# Altium PCB 5V_PSU_Daniel_Eisen_rev0.PcbDoc
Units mm, origin at the board's own origin, x right, y up, seen from the top; angles counter-clockwise.
Board outline 40 x 38.5 mm, 2 copper layers (Top Layer, Bottom Layer); 14 components, 6 nets, 25 pads, 0 vias.
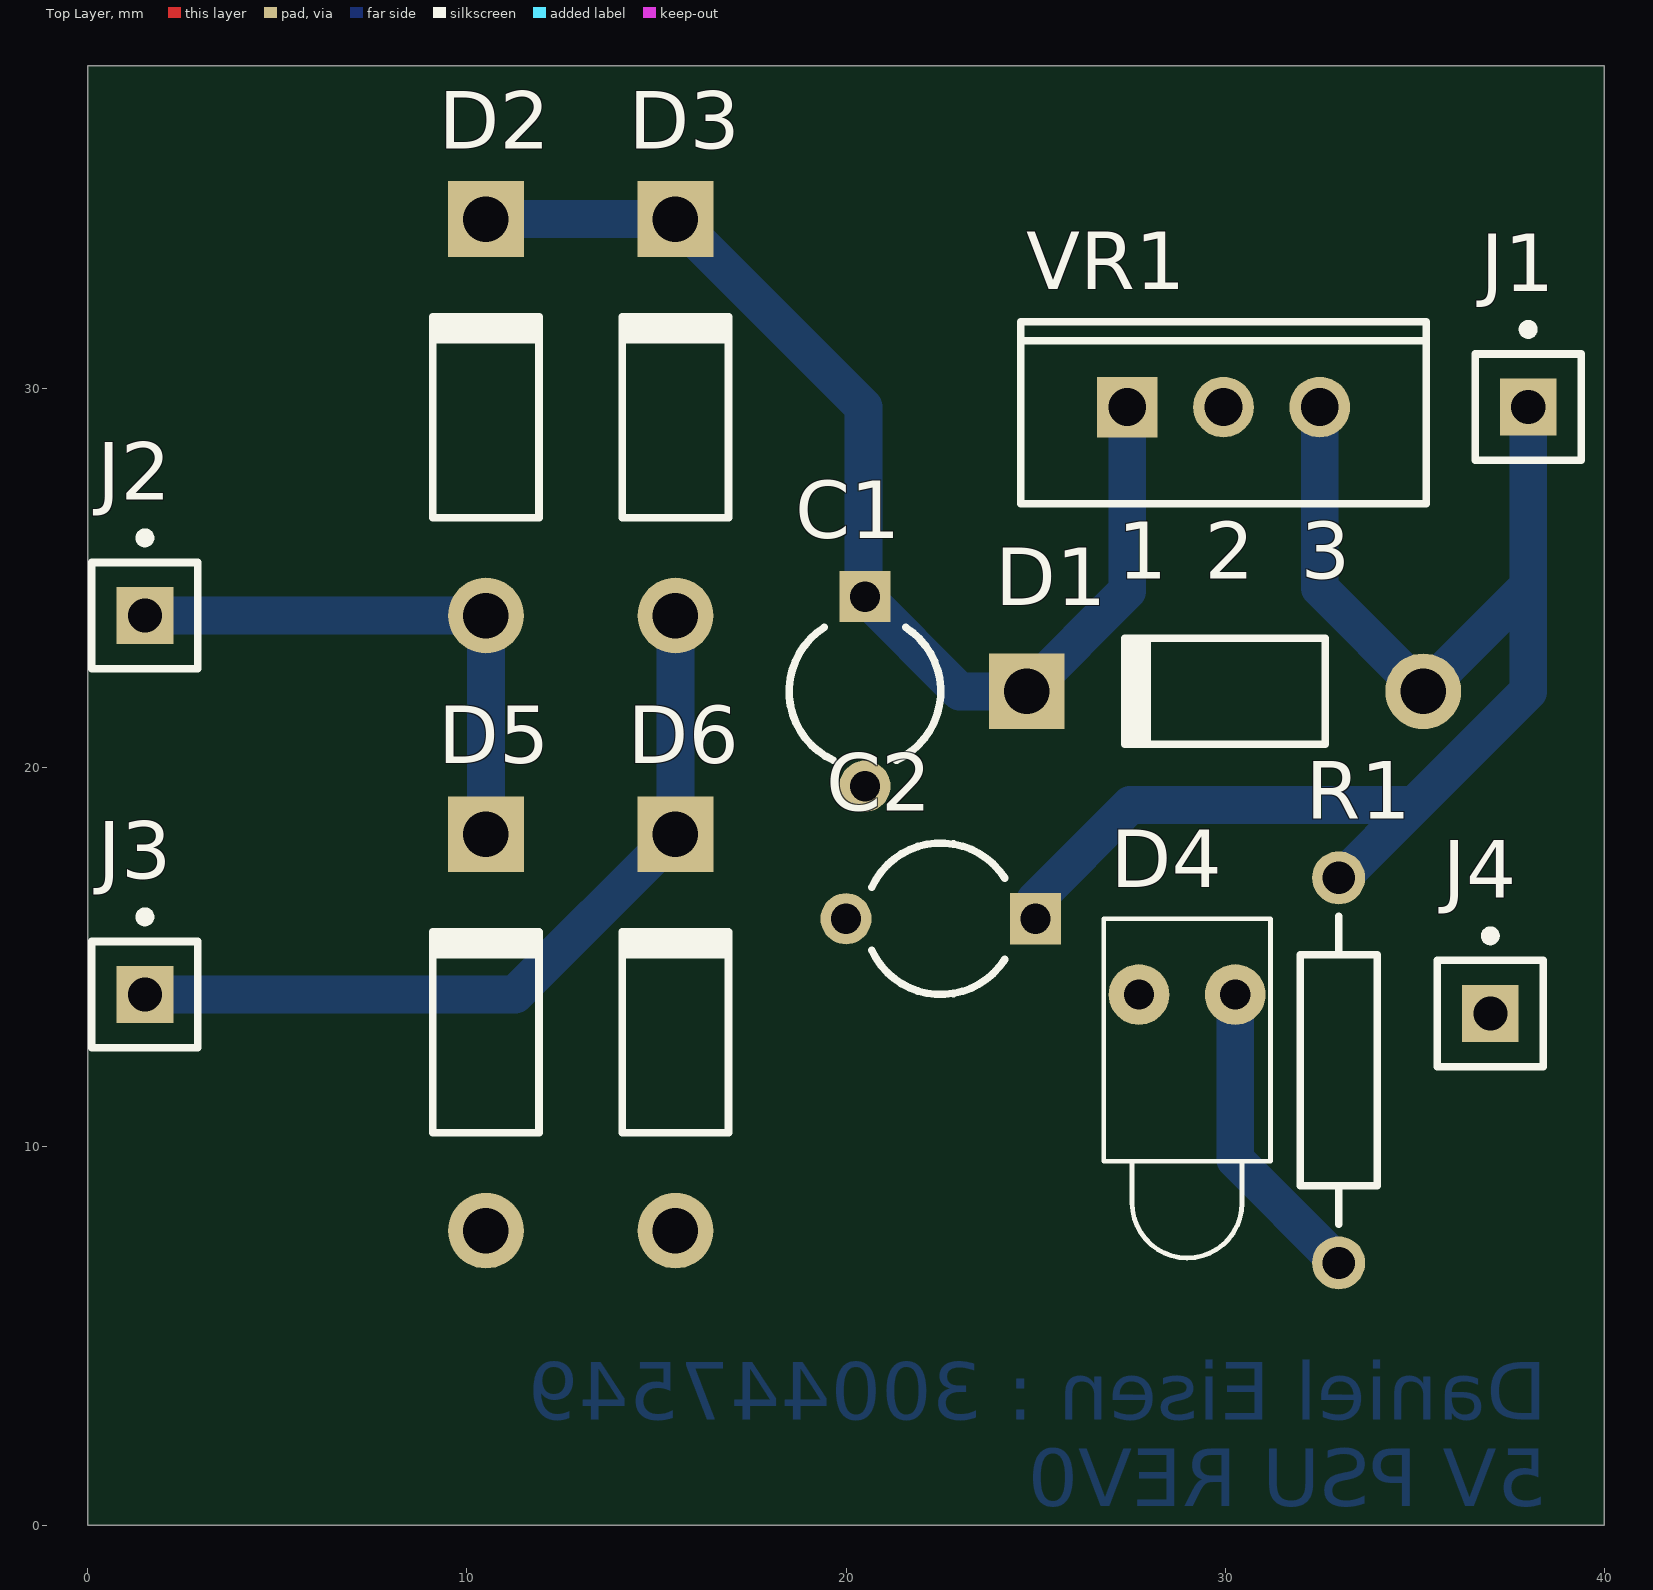
[diagram p0: Top Layer view]
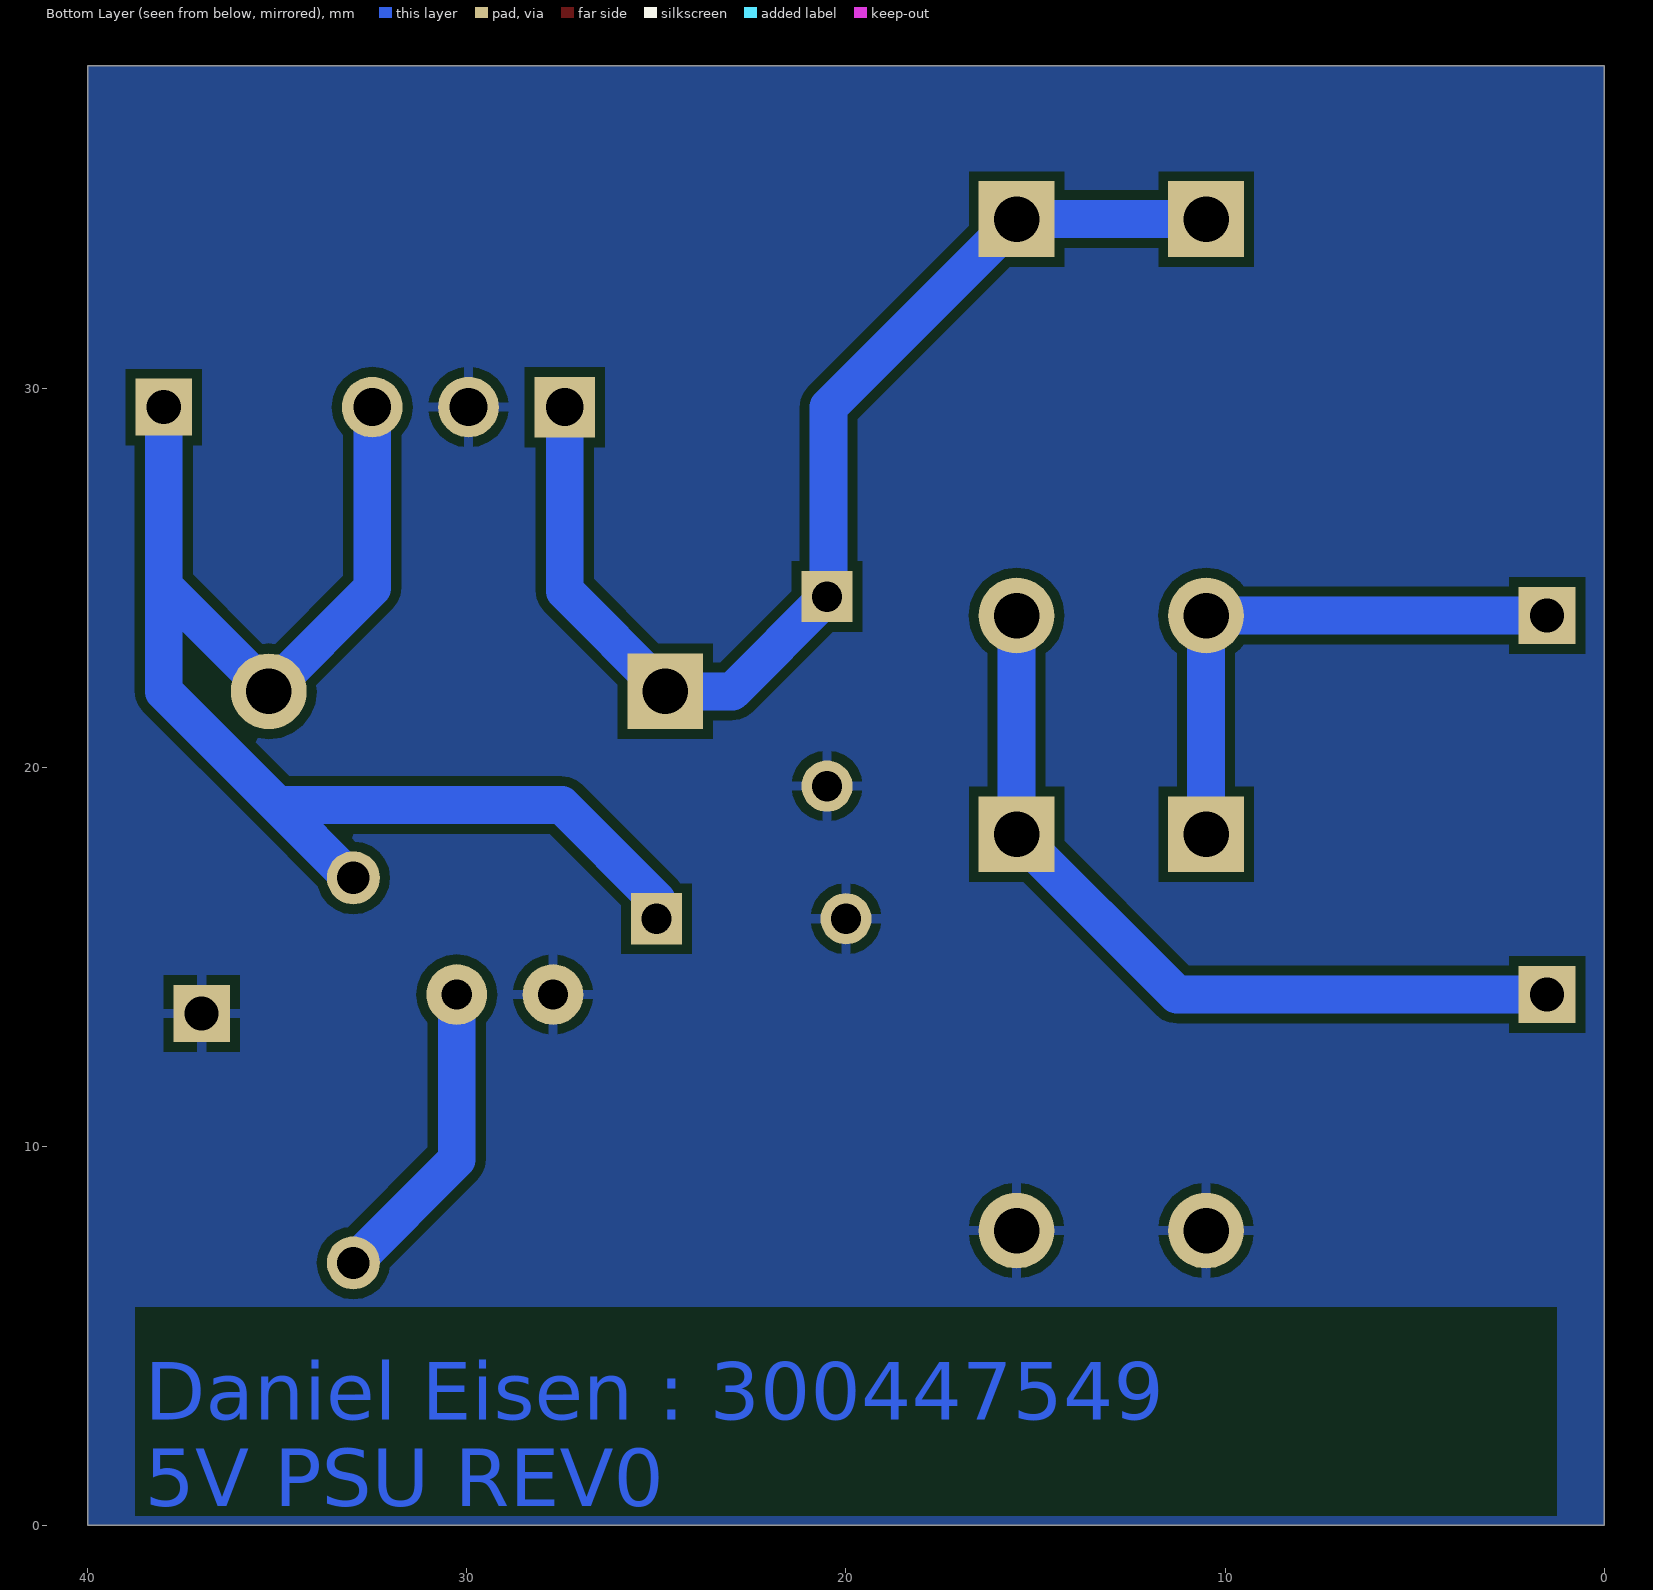
[diagram p1: Bottom Layer view, seen from below]

## Layer stack, top to bottom
Top Solder: solder mask 0.0102, Solder Resist, Dk 3.5
Top Layer: signal copper 0.0356
Dielectric 1: dielectric 0.32, FR-4, Dk 4.8
Bottom Layer: signal copper 0.0356
Bottom Solder: solder mask 0.0102, Solder Resist, Dk 3.5

## Board outline
0,0 0,38.5 40,38.5 40,0

## Design rules (kind name [scope] priority, off if disabled: settings)
Clearance [All] p1: gap=0.254 ignorepadtopadclearanceinfootprint=FALSE except(0: Arc-Hole Track-Hole SMDPad-Hole THPad-Hole Via-Hole Fill-Hole Poly-Hole Region-Hole Text-Hole)
PolygonConnect [All] p1: connectstyle=Relief reliefconductorwidth=0.254 reliefentries=4 polygonreliefangle="90 Angle" airgapwidth=0.254
RoutingVias [All] p1: holewidth=0.711 width=1.27 viastyle="Through Hole" minholewidth=0.711 minwidth=1.27 maxholewidth=0.711 maxwidth=1.27
SolderMaskExpansion [All] p1: expansion=0.102
Width [All] p1: maxlimit=2 minlimit=0.5 preferedwidth=1 minimp=50.000000 maximp=50.000000 favimp=50.000000
30 further rules are at their usual default settings.

## Classes and differential pairs
component class 5V_PSU_Daniel_Eisen_rev0: C1 D1 D2 D3 D4 D5 D6 J1 J2 J3 J4 R1 VR1

## Components (designator, comment, footprint, x,y, rotation, side; value= is the part's Value field where it differs from the comment)
C1 "Cap2" CAPR5-4X5 20.5,22 r270 top value=1uF
C2 "Cap2" CAPR5-4X5 22.5,16 r180 top value=1uF
D1 "Diode 1N4001" DO-41 30,22 r180 top
D2 "Diode 1N4001" DO-41 10.5,29.23 r90 top
D3 "Diode 1N4001" DO-41 15.5,29.23 r90 top
D4 "LED1" LED-1 29,14 r270 top
D5 "Diode 1N4001" DO-41 10.5,13 r90 top
D6 "Diode 1N4001" DO-41 15.5,13 r90 top
J1 "Socket" PIN1 38,29.5 r0 top
J2 "Socket" PIN1 1.5,24 r0 top
J3 "Socket" PIN1 1.5,14 r0 top
J4 "Socket" PIN1 37,13.5 r0 top
R1 "Res2" AXIAL-0.4 33,12 r90 top value=510R
VR1 "Volt Reg" TO-220-AB 29.96,29.5 r0 top

## Footprints (in the part's own frame and the unit in brackets; to place one, negate y for a bottom-side part, rotate by r counter-clockwise, add the part's x,y. Pads: shape width x height; smd on the part's side, far side on the other; paste and mask are expansions set on the pad)
AXIAL-0.4 [mm] "Axial Device, Thru-Hole; 2 Leads; 0.4 in Pin Spacing"
  round 1.4 hole 0.85: 1(-5.08,0) 2(5.08,0)
  silkscreen extent -4.06,-1.02 4.06,1.02
CAPR5-4X5 [mm] "Capacitor; 2 Leads"
  rect 1.35x1.35 hole 0.8: 1(-2.5,0)
  round 1.35 hole 0.8: 2(2.5,0)
  silkscreen extent -1.69,-2 1.82,2
DO-41 [mm] "Diode, Axial; Body 5.2 x 2.7 mm (LxDia. max), Lead Dia. 0.86 mm (max)"
  round 2 hole 1.2: 1(-5.23,0)
  rect 2x2 hole 1.2: 2(5.23,0)
  silkscreen extent -2.65,-1.4 2.75,1.4
LED-1 [mm] "LED; 2 Leads"
  round 1.6 hole 0.8: 1(0,1.27) 2(0,-1.27)
  silkscreen extent -2,-2.2 6.95,2.2
PIN1 [mm] "Connector; Plug"
  rect 1.5x1.5 hole 0.9: 1(0,0)
  silkscreen extent -1.4,-1.4 1.4,2.17
TO-220-AB [mm] "TO, Thru-Hole, Vertical, Heatsink Mounted; 3 In-Line Leads; Pitch 2.54 mm"
  rect 1.6x1.6 hole 1: 1(-2.54,0)
  round 1.6 hole 1: 2(0,0) 3(2.54,0)
  silkscreen extent -5.35,-2.55 5.35,2.25

## Part data
C1 C2: "Capacitor", PackageDescription="Capacitor; 2 Leads", PackageReference=CAPR5-4X5, Published=23-Sep-2002, Publisher="Altium Limited"
D1 D2 D3 D5 D6: "1 Amp General Purpose Rectifier", Code_JEDEC=DO-204-AL, ComponentLink1Description="Manufacturer Link", ComponentLink1URL=http://www.fairchildsemi.com/, ComponentLink2Description=Datasheet, ComponentLink2URL=http://www.fairchildsemi.com/ds/1N%2F1N4001.pdf, DatasheetVersion=1998, LatestRevisionDate=17-Jul-2002, LatestRevisionNote="Re-released for DXP Platform.", PackageDescription="Diode, Axial; Body 5.2 x 2.7 mm (LxDia. max), Lead Dia. 0.86 mm (max)", PackageReference=DO-41, PackageVersion=Aug-1999, Published=8-Jun-2000, Publisher="Altium Limited"
D4: "Typical RED GaAs LED", LatestRevisionDate=08-Jul-2005, LatestRevisionNote="Mech Layer 1 removed.", PackageDescription="LED; 2 Leads", PackageReference=LED-1, Published=8-Jun-2000, Publisher="Altium Limited"
R1: "Resistor", LatestRevisionDate=17-Jul-2002, LatestRevisionNote="Re-released for DXP Platform.", PackageDescription="Axial Device, Thru-Hole; 2 Leads; 0.4 in Pin Spacing", PackageReference=AXIAL-0.4, Published=8-Jun-2000, Publisher="Altium Limited"
VR1: "Voltage Regulator", LatestRevisionDate=29-May-2009, LatestRevisionNote="IPC-7351 Footprint Added.", PackageDescription="3-Pin Transistor Outline Package 2.54 mm Pitch, 15.1 mm Lead Span", PackageReference=D2PAK, Published=24-Mar-1999, Publisher="Altium Limited"
J1 J2 J3 J4: LatestRevisionDate=17-Jul-2002, LatestRevisionNote="Re-released for DXP Platform.", Publisher="Altium Limited"

## Nets (pads, with @x,y where several pads share a name; then routed paths per layer and width w, separated by ;. In a path a pad name is that pad's centre, name@x,y a point inside that pad or via, vN(x,y) a via of type N, cw(c..) or ccw(c..) an arc to the next point about the centre after c; other vN are vias at no path point)
AC-IN1: D2.1 D5.2 J2.1 | length 14.8
  Bottom Layer w1: J2.1 D2.1 D5.2
AC-IN2: D3.1 D6.2 J3.1 | length 21.5
  Bottom Layer w1: J3.1 11.27,14 D6.2 D3.1
DC-VIN: C1.1 D1.2 D2.2 D3.2 VR1.1 | length 30.9
  Bottom Layer w1: D2.2 D3.2 20.46,29.5 20.46,24.54 C1.1 23,22 D1.2 27.42,24.65 VR1.1
DC-VOUT: C2.1 D1.1 J1.1 R1.2 VR1.3 | length 38.6
  Bottom Layer w1: C2.1 25,16.5 27.5,19 35,19 ; VR1.3 32.5,24.73 D1.1 38,24.77 ; R1.2 33.08,17.08 35,19 ; J1.1 38,24.77 ; 35,19 38,22 38,24.77
GRD: C1.2 C2.2 D4.2 D5.1 D6.1 J4.1 VR1.2 | length 0
NetD4_1: D4.1 R1.1 | length 8.2
  Bottom Layer w1: D4.1 30.27,9.65 R1.1

## Polygon pours and split planes (outlines as drawn)
GRD on Bottom Layer "Bottom Layer-No Net" (solid, pour order 0): 0,0 0,38.5 40,38.5 40,0

## Other copper
Bottom Layer:
  text "Daniel Eisen : 300447549 / 5V PSU REV0" at 38.5,0.5 h1.52

## Silkscreen, mask and mechanical layers (free items; w line width, h text height)
Mechanical 1:
  the board outline again, w0.254

## Text inside footprints (layer, text, board x,y; h text height)
VR1: Top Overlay "1" at 27.17,24.975 h1.5; Top Overlay "2" at 29.46,24.975 h1.5; Top Overlay "3" at 32,24.975 h1.5